# Altium PCB Copy4 of PWR_PCB.PcbDoc (part 2 of 3)
Units mil, origin at the board's own origin, x right, y up, seen from the top; angles counter-clockwise.
Board outline 8100 x 5345 mil, 4 copper layers (Top Layer, GND Layer, Power Layer, Bottom Layer), stack 27.912 mil thick; 117 components, 88 nets, 440 pads, 3252 vias.
Unrouted connection lines stored in the file: 22.
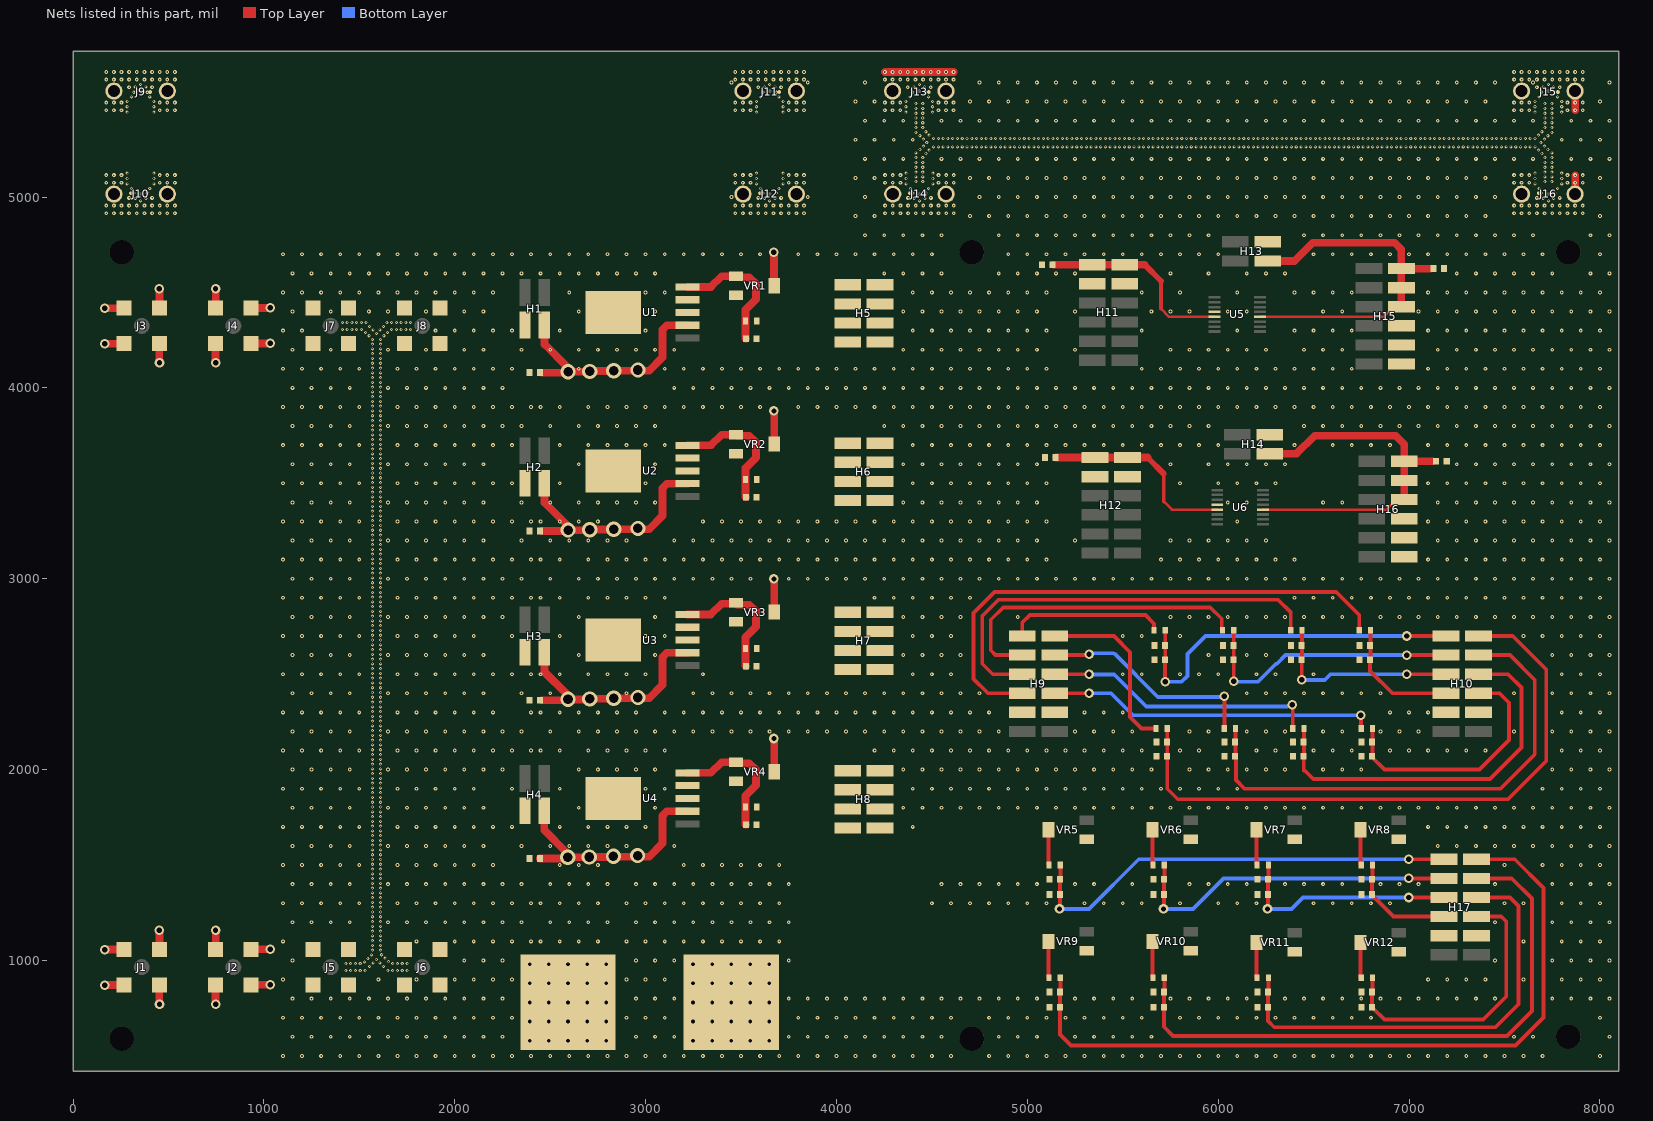
[diagram p4: the nets of this part, all layers, seen from the top]

## Via types
v1: diameter 20, hole 9, Top Layer to Bottom Layer, tented both sides, 2106 vias
v2: diameter 16, hole 8, Top Layer to Bottom Layer, 642 vias
v3: diameter 20, hole 8, Top Layer to Bottom Layer, tented both sides, 272 vias
v4: diameter 16, hole 8, Top Layer to Bottom Layer, tented both sides, 104 vias
v5: diameter 50, hole 28, Top Layer to Bottom Layer, 62 vias
v6: diameter 30, hole 19, Top Layer to Bottom Layer, 50 vias
v7: diameter 80, hole 50, Top Layer to Bottom Layer, 16 vias

## Nets (pads, with @x,y where several pads share a name; then routed paths per layer and width w, separated by ;. In a path a pad name is that pad's centre, name@x,y a point inside that pad or via, vN(x,y) a via of type N, cw(c..) or ccw(c..) an arc to the next point about the centre after c; other vN are vias at no path point) (continued)
GND: C1.1 C2.1 C3.1 C4.1 C9.1 C10.1 C11.1 C12.1 C13.1 C14.1 C15.1 C16.1 C17.1 C18.1 C19.1 C20.1 C21.1 C22.1 C23.1 C24.1 C25.1 C26.1 C27.1 C28.1 C29.1 C30.1 C31.1 C32.1 C33.1 C34.1 C35.1 C36.1 C37.1 C38.1 C39.1 C40.1 C41.1 C42.1 C43.1 C44.1 H1.1 H2.1 H3.1 H4.1 H5.1 H5.3 H5.5 H5.7 H6.1 H6.3 H6.5 H6.7 H7.1 H7.3 H7.5 H7.7 H8.1 H8.3 H8.5 H8.7 H9.5 H9.11 H10.5 H10.11 H11.5 H11.11 H12.5 H12.11 H13.3 H14.3 H15.1 H15.2 H15.3 H16.1 H16.2 H16.3 H17.5 H17.11 J1.2 J1.3 J1.4 J1.5 J2.2 J2.3 J2.4 J2.5 J3.2 J3.3 J3.4 J3.5 J4.2 J4.3 J4.4 J4.5 J5.2 J5.3 J5.4 J5.5 J6.2 J6.3 J6.4 J6.5 J7.2 J7.3 J7.4 J7.5 J8.2 J8.3 J8.4 J8.5 J9.1 J9.2 J9.4 J10.1 J10.2 J10.4 J11.1 J11.2 J11.4 J12.1 J12.2 J12.4 J13.1 J13.2 J13.4 J14.1 J14.2 J14.4 J15.1 J15.2 J15.4 J16.1 J16.2 J16.4 P2.1 U1.3 U1.6 U2.3 U2.6 U3.3 U3.6 U4.3 U4.6 U5.12 U6.12 VR1.2 VR2.2 VR3.2 VR4.2 | length 2865.5
  Top Layer w40: v5(165.75,1057) 166.5,1057.75 265.75,1057.75 J1.3@266.5,1058.5 ; v5(165.75,4417) 166.5,4417.75 265.75,4417.75 J3.3@266.5,4418.5 ; v5(166.5,870.75) 167.25,871.5 J1.2@266.5,871.5 ; v5(166.5,4230.75) 167.25,4231.5 J3.2@266.5,4231.5 ; J1.5@452.52,871.5 452.52,772.25 v5(453.27,771.5) ; J3.5@452.52,4231.5 452.52,4132.25 v5(453.27,4131.5) ; v5(452.75,1158.5) 453.5,1157.75 J1.4@453.5,1058.5 ; v5(452.75,4518.5) 453.5,4517.75 J3.4@453.5,4418.5 ; J2.2@746.5,871.5 746.5,772.25 v5(747.25,771.5) ; J4.2@746.5,4231.5 746.5,4132.25 v5(747.25,4131.5) ; v5(746.73,1158.5) 747.48,1157.75 J2.3@747.48,1058.5 ; v5(746.73,4518.5) 747.48,4517.75 J4.3@747.48,4418.5 ; J2.5@933.5,871.5 934.25,872.25 1033.5,872.25 v5(1034.25,873) ; J2.4@933.5,1058.5 1032.75,1058.5 v5(1033.5,1059.25) ; J4.5@933.5,4231.5 934.25,4232.25 1033.5,4232.25 v5(1034.25,4233) ; J4.4@933.5,4418.5 1032.75,4418.5 v5(1033.5,4419.25) ; v5(3671.5,4710) 3672.49,4709.02 3672.49,4535.98 VR1.2@3673.47,4535 ; VR4.2@3673.47,1988.92 v5@3673.47,2161.95 ; VR3.2@3673.47,2825 v5@3673.47,2998.03 ; VR2.2@3673.47,3705 v5@3673.47,3878.03 ; v3(4254,5655) v3(4294,5655) v3(4334,5655) v3(4374,5655) v3(4414,5655) v3(4454,5655) v3(4494,5655) v3(4534,5655) v3(4574,5655) v3(4614,5655) ; J13.4@4294,5555 J13.4@4294.5,5554.5 ; J14.1@4294.5,5015.5 J14.1@4295,5015 ; J16.4@7870,5015 v3(7870,5075) v3(7870,5115) ; v3(7870,5455) v3(7870,5495) J15.1@7870,5555
  other v1: 1100,500 1200,500 1300,500 1400,500 1500,500 1600,500 1700,500 1800,500 1900,500 2000,500 2100,500 2200,500 2300,500 2400,500 2500,500 2600,500 2700,500 2800,500 2900,500 3000,500 3100,500 3200,500 3300,500 3400,500 3500,500 3600,500 3700,500 3800,500 3900,500 4000,500 4100,500 4200,500 4300,500 4400,500 4500,500 4600,500 4800,500 4900,500 5000,500 5100,500 5200,500 5300,500 5400,500 5500,500 5600,500 5700,500 5800,500 5900,500 6000,500 6100,500 6200,500 6300,500 6400,500 6500,500 6600,500 6700,500 6800,500 6900,500 7000,500 7100,500 7200,500 7300,500 7400,500 7500,500 7600,500 7700,500 8000,500 1150,600 1250,600 1350,600 1450,600 1550,600 1650,600 1750,600 1850,600 1950,600 2050,600 2150,600 2250,600 2950,600 3050,600 3150,600 3750,600 3850,600 3950,600 4050,600 4150,600 4250,600 4350,600 4450,600 4550,600 4850,600 4950,600 5050,600 5250,600 5350,600 5450,600 5550,600 5650,600 7550,600 7650,600 8050,600 1100,700 1200,700 1300,700 1400,700 1500,700 1600,700 1700,700 1800,700 1900,700 2000,700 2100,700 2200,700 2300,700 2900,700 3000,700 3100,700 3800,700 3900,700 4000,700 4100,700 4200,700 4300,700 4400,700 4500,700 4600,700 4800,700 4900,700 5000,700 5100,700 5200,700 5300,700 5400,700 5500,700 5600,700 5800,700 5900,700 6000,700 6100,700 6200,700 6300,700 6400,700 6500,700 6600,700 6700,700 6800,700 8000,700 1150,800 1250,800 1350,800 1450,800 1550,800 1650,800 1750,800 1850,800 1950,800 2050,800 2150,800 2250,800 2950,800 3050,800 3150,800 3750,800 3850,800 3950,800 4050,800 4150,800 4250,800 4350,800 4450,800 4550,800 4650,800 4750,800 4850,800 4950,800 5050,800 5250,800 5350,800 5450,800 5550,800 5750,800 5850,800 5950,800 6050,800 6150,800 6350,800 6450,800 6550,800 6650,800 6750,800 6850,800 6950,800 7050,800 7150,800 7250,800 7350,800 7450,800 7750,800 7850,800 7950,800 8050,800 1100,900 1600,900 1800,900 2000,900 2100,900 2200,900 2300,900 2900,900 3000,900 3100,900 7100,900 7200,900 7300,900 7400,900 7600,900 7800,900 7900,900 8000,900 1150,1000 2050,1000 2150,1000 2250,1000 2950,1000 3050,1000 3150,1000 3750,1000 7450,1000 7750,1000 7850,1000 7950,1000 8050,1000 1100,1100 1800,1100 2000,1100 2100,1100 2200,1100 2300,1100 2400,1100 2900,1100 3000,1100 3100,1100 3200,1100 3300,1100 3400,1100 3500,1100 3600,1100 3700,1100 7600,1100 7800,1100 7900,1100 8000,1100 1150,1200 1250,1200 1350,1200 1450,1200 1650,1200 1750,1200 1850,1200 1950,1200 2050,1200 2150,1200 2250,1200 2350,1200 2950,1200 3050,1200 3150,1200 3250,1200 3350,1200 3450,1200 3550,1200 3650,1200 3750,1200 7450,1200 7750,1200 7850,1200 7950,1200 8050,1200 1100,1300 1200,1300 1300,1300 1400,1300 1500,1300 1700,1300 1800,1300 1900,1300 2000,1300 2100,1300 2200,1300 2300,1300 2400,1300 2900,1300 3000,1300 3100,1300 3200,1300 3300,1300 3400,1300 3500,1300 3600,1300 3700,1300 4500,1300 4600,1300 4700,1300 4800,1300 4900,1300 5000,1300 5100,1300 5300,1300 5400,1300 5500,1300 5600,1300 5800,1300 6000,1300 6100,1300 6200,1300 6500,1300 6600,1300 6700,1300 6800,1300 6900,1300 7500,1300 7600,1300 7800,1300 7900,1300 8000,1300 1150,1400 1250,1400 1350,1400 1450,1400 1650,1400 1750,1400 1850,1400 1950,1400 2050,1400 2150,1400 2250,1400 2350,1400 2950,1400 3050,1400 3150,1400 3250,1400 3350,1400 3450,1400 3550,1400 3650,1400 3750,1400 4550,1400 4650,1400 4750,1400 4850,1400 4950,1400 5050,1400 5250,1400 5350,1400 5550,1400 5850,1400 5950,1400 6050,1400 6150,1400 6350,1400 6450,1400 6550,1400 6650,1400 6850,1400 6950,1400 7050,1400 7450,1400 7750,1400 7850,1400 7950,1400 8050,1400 1100,1500 1200,1500 1300,1500 1400,1500 1500,1500 1700,1500 1800,1500 1900,1500 2000,1500 2100,1500 2200,1500 3200,1500 3300,1500 3400,1500 3500,1500 3600,1500 3700,1500 7500,1500 7700,1500 7800,1500 7900,1500 8000,1500 1150,1600 1250,1600 1350,1600 1450,1600 1650,1600 1750,1600 1850,1600 1950,1600 2050,1600 2150,1600 2350,1600 3150,1600 7150,1600 7250,1600 7350,1600 7450,1600 7550,1600 7650,1600 7750,1600 7850,1600 7950,1600 8050,1600 1100,1700 1200,1700 1300,1700 1400,1700 1500,1700 1700,1700 1800,1700 1900,1700 2000,1700 2100,1700 2200,1700 2300,1700 2700,1700 2800,1700 2900,1700 3000,1700 4400,1700 7100,1700 7200,1700 7300,1700 7400,1700 7500,1700 7600,1700 7700,1700 7800,1700 7900,1700 8000,1700 1150,1800 1250,1800 1350,1800 1450,1800 1650,1800 1750,1800 1850,1800 1950,1800 2050,1800 2150,1800 2650,1800 3050,1800 4350,1800 4450,1800 4550,1800 4650,1800 4750,1800 4850,1800 4950,1800 5050,1800 5150,1800 5250,1800 5350,1800 5450,1800 5550,1800 5650,1800 5750,1800 5850,1800 5950,1800 6050,1800 6150,1800 6250,1800 6350,1800 6450,1800 6550,1800 6650,1800 6750,1800 6850,1800 6950,1800 7050,1800 7150,1800 7250,1800 7350,1800 7450,1800 7550,1800 7650,1800 7750,1800 7850,1800 7950,1800 8050,1800 1100,1900 1200,1900 1300,1900 1400,1900 1500,1900 1700,1900 1800,1900 1900,1900 2000,1900 2100,1900 2300,1900 3000,1900 3100,1900 4400,1900 4500,1900 4600,1900 4700,1900 4800,1900 4900,1900 5000,1900 5100,1900 5200,1900 5300,1900 5400,1900 5500,1900 5600,1900 5700,1900 5800,1900 5900,1900 6000,1900 6100,1900 7700,1900 7800,1900 7900,1900 8000,1900 1150,2000 1250,2000 1350,2000 1450,2000 1650,2000 1750,2000 1850,2000 1950,2000 2050,2000 2150,2000 2250,2000 2650,2000 2750,2000 2850,2000 2950,2000 3050,2000 4350,2000 4450,2000 4550,2000 4650,2000 4750,2000 4850,2000 4950,2000 5050,2000 5150,2000 5250,2000 5350,2000 5450,2000 5550,2000 5650,2000 5850,2000 5950,2000 6050,2000 6150,2000 6250,2000 6350,2000 6550,2000 6650,2000 6750,2000 7750,2000 7850,2000 7950,2000 8050,2000 1100,2100 1200,2100 1300,2100 1400,2100 1500,2100 1700,2100 1800,2100 1900,2100 2000,2100 2100,2100 2200,2100 2300,2100 2400,2100 2700,2100 2800,2100 2900,2100 3000,2100 3100,2100 4200,2100 4300,2100 4400,2100 4500,2100 4600,2100 4700,2100 4800,2100 4900,2100 5000,2100 5100,2100 5200,2100 5300,2100 5400,2100 5500,2100 5600,2100 5800,2100 5900,2100 6200,2100 6300,2100 6500,2100 6600,2100 6700,2100 6900,2100 7000,2100 7100,2100 7200,2100 7300,2100 7400,2100 7800,2100 7900,2100 8000,2100 1150,2200 1250,2200 1350,2200 1450,2200 1650,2200 1750,2200 1850,2200 1950,2200 2050,2200 2150,2200 2250,2200 2350,2200 2650,2200 2750,2200 2850,2200 2950,2200 3050,2200 3150,2200 3250,2200 3350,2200 3450,2200 3550,2200 3650,2200 3750,2200 3850,2200 3950,2200 4050,2200 4150,2200 4250,2200 4350,2200 4450,2200 4550,2200 4650,2200 4750,2200 4850,2200 5250,2200 5350,2200 5450,2200 5550,2200 5850,2200 5950,2200 6150,2200 6250,2200 6350,2200 6550,2200 6650,2200 6850,2200 6950,2200 7050,2200 7550,2200 7750,2200 7850,2200 7950,2200 8050,2200 1100,2300 1200,2300 1300,2300 1400,2300 1500,2300 1700,2300 1800,2300 1900,2300 2000,2300 2100,2300 2200,2300 2400,2300 3100,2300 3200,2300 3300,2300 3400,2300 3500,2300 3600,2300 3700,2300 3800,2300 3900,2300 4000,2300 4100,2300 4200,2300 4300,2300 4400,2300 4500,2300 4600,2300 4700,2300 4800,2300 5300,2300 5400,2300 5500,2300 6900,2300 7000,2300 7100,2300 7800,2300 7900,2300 8000,2300 1150,2400 1250,2400 1350,2400 1450,2400 1650,2400 1750,2400 1850,2400 1950,2400 2050,2400 2150,2400 2350,2400 3250,2400 3350,2400 3450,2400 3550,2400 3650,2400 3750,2400 3850,2400 3950,2400 4050,2400 4150,2400 4250,2400 4350,2400 4450,2400 4550,2400 4650,2400 4750,2400 6150,2400 6250,2400 6350,2400 6450,2400 6550,2400 6650,2400 6750,2400 6850,2400 7550,2400 7750,2400 7850,2400 7950,2400 8050,2400 1100,2500 1200,2500 1300,2500 1400,2500 1500,2500 1700,2500 1800,2500 1900,2500 2000,2500 2100,2500 2200,2500 2300,2500 2400,2500 2700,2500 2800,2500 2900,2500 3000,2500 3300,2500 4400,2500 4500,2500 4600,2500 5500,2500 5600,2500 5800,2500 5900,2500 6000,2500 6200,2500 6300,2500 6500,2500 7800,2500 7900,2500 8000,2500 1150,2600 1250,2600 1350,2600 1450,2600 1650,2600 1750,2600 1850,2600 1950,2600 2050,2600 2150,2600 2650,2600 3050,2600 4350,2600 4450,2600 4550,2600 4650,2600 5950,2600 6150,2600 6250,2600 7750,2600 7850,2600 7950,2600 8050,2600 1100,2700 1200,2700 1300,2700 1400,2700 1500,2700 1700,2700 1800,2700 1900,2700 2000,2700 2100,2700 2300,2700 3000,2700 3100,2700 4400,2700 4500,2700 4600,2700 5500,2700 5600,2700 5800,2700 7600,2700 7700,2700 7800,2700 7900,2700 8000,2700 1150,2800 1250,2800 1350,2800 1450,2800 1650,2800 1750,2800 1850,2800 1950,2800 2050,2800 2150,2800 2250,2800 2650,2800 3050,2800 4350,2800 4450,2800 4550,2800 4650,2800 4950,2800 5750,2800 5850,2800 5950,2800 6050,2800 6150,2800 6250,2800 6350,2800 6450,2800 6550,2800 6650,2800 6850,2800 6950,2800 7050,2800 7150,2800 7250,2800 7350,2800 7450,2800 7550,2800 7650,2800 7750,2800 7850,2800 7950,2800 8050,2800 1100,2900 1200,2900 1300,2900 1400,2900 1500,2900 1700,2900 1800,2900 1900,2900 2000,2900 2100,2900 2200,2900 2300,2900 2400,2900 2700,2900 2800,2900 2900,2900 3000,2900 3100,2900 4200,2900 4300,2900 4400,2900 4500,2900 4600,2900 4700,2900 6400,2900 6500,2900 6600,2900 6700,2900 6800,2900 6900,2900 7000,2900 7100,2900 7200,2900 7300,2900 7400,2900 7500,2900 7600,2900 7700,2900 7800,2900 7900,2900 8000,2900 1150,3000 1250,3000 1350,3000 1450,3000 1650,3000 1750,3000 1850,3000 1950,3000 2050,3000 2150,3000 2250,3000 2350,3000 2650,3000 2750,3000 2850,3000 2950,3000 3050,3000 3150,3000 3250,3000 3350,3000 3450,3000 3550,3000 3750,3000 3850,3000 3950,3000 4050,3000 4150,3000 4250,3000 4350,3000 4450,3000 4550,3000 4650,3000 4750,3000 4850,3000 4950,3000 5050,3000 5150,3000 5250,3000 5350,3000 5450,3000 5550,3000 5650,3000 5750,3000 5850,3000 5950,3000 6050,3000 6150,3000 6250,3000 6350,3000 6450,3000 6550,3000 6650,3000 6750,3000 6850,3000 6950,3000 7050,3000 7150,3000 7250,3000 7350,3000 7450,3000 7550,3000 7650,3000 7750,3000 7850,3000 7950,3000 8050,3000 1100,3100 1200,3100 1300,3100 1400,3100 1500,3100 1700,3100 1800,3100 1900,3100 2000,3100 2100,3100 2200,3100 2300,3100 2400,3100 2700,3100 2800,3100 2900,3100 3000,3100 3100,3100 3200,3100 3300,3100 3400,3100 3500,3100 3600,3100 3700,3100 3800,3100 3900,3100 4000,3100 4100,3100 4200,3100 4300,3100 4400,3100 4500,3100 4600,3100 4700,3100 4800,3100 4900,3100 5000,3100 5100,3100 5700,3100 5800,3100 5900,3100 6000,3100 6100,3100 6200,3100 6300,3100 6400,3100 7100,3100 7200,3100 7300,3100 7400,3100 7500,3100 7600,3100 7700,3100 7800,3100 7900,3100 8000,3100 1150,3200 1250,3200 1350,3200 1450,3200 1650,3200 1750,3200 1850,3200 1950,3200 2050,3200 2150,3200 2350,3200 3150,3200 3250,3200 3350,3200 3450,3200 3550,3200 3650,3200 3750,3200 3850,3200 3950,3200 4050,3200 4150,3200 4250,3200 4350,3200 4450,3200 4550,3200 4650,3200 4750,3200 4850,3200 4950,3200 5050,3200 5250,3200 5750,3200 5850,3200 5950,3200 6050,3200 6150,3200 6250,3200 7150,3200 7250,3200 7350,3200 7450,3200 7550,3200 7650,3200 7750,3200 7850,3200 7950,3200 8050,3200 1100,3300 1200,3300 1300,3300 1400,3300 1500,3300 1700,3300 1800,3300 1900,3300 2000,3300 2100,3300 2200,3300 2300,3300 2400,3300 3300,3300 3400,3300 3500,3300 3600,3300 3700,3300 3800,3300 3900,3300 4000,3300 4100,3300 4200,3300 4300,3300 4400,3300 4500,3300 4600,3300 4700,3300 4800,3300 4900,3300 5000,3300 5100,3300 6100,3300 7100,3300 7200,3300 7300,3300 7400,3300 7500,3300 7600,3300 7700,3300 7800,3300 7900,3300 8000,3300 1150,3400 1250,3400 1350,3400 1450,3400 1650,3400 1750,3400 1850,3400 1950,3400 2050,3400 2150,3400 2350,3400 2650,3400 2750,3400 2850,3400 2950,3400 3050,3400 4350,3400 4450,3400 4550,3400 4650,3400 4750,3400 4850,3400 4950,3400 5050,3400 6050,3400 6150,3400 6550,3400 6650,3400 7150,3400 7250,3400 7350,3400 7450,3400 7550,3400 7650,3400 7750,3400 7850,3400 7950,3400 8050,3400 1100,3500 1200,3500 1300,3500 1400,3500 1500,3500 1700,3500 1800,3500 1900,3500 2000,3500 2100,3500 2200,3500 2300,3500 3000,3500 4400,3500 4500,3500 4600,3500 4700,3500 4800,3500 4900,3500 5000,3500 5100,3500 5800,3500 6000,3500 6100,3500 6200,3500 6300,3500 7100,3500 7200,3500 7300,3500 7400,3500 7500,3500 7600,3500 7700,3500 7800,3500 7900,3500 8000,3500 1150,3600 1250,3600 1350,3600 1450,3600 1650,3600 1750,3600 1850,3600 1950,3600 2050,3600 2150,3600 2650,3600 3050,3600 4350,3600 4450,3600 4550,3600 4650,3600 4750,3600 4850,3600 4950,3600 5050,3600 5750,3600 5950,3600 6050,3600 6150,3600 6250,3600 6350,3600 7250,3600 7350,3600 7450,3600 7550,3600 7650,3600 7750,3600 7850,3600 7950,3600 8050,3600 1100,3700 1200,3700 1300,3700 1400,3700 1500,3700 1700,3700 1800,3700 1900,3700 2000,3700 2100,3700 2200,3700 2300,3700 2700,3700 2800,3700 2900,3700 3000,3700 3100,3700 4400,3700 4500,3700 4600,3700 4700,3700 4800,3700 4900,3700 5000,3700 5100,3700 5200,3700 5300,3700 5400,3700 5500,3700 5600,3700 5700,3700 5800,3700 5900,3700 6000,3700 6400,3700 6600,3700 6700,3700 6800,3700 6900,3700 7100,3700 7200,3700 7300,3700 7400,3700 7500,3700 7600,3700 7700,3700 7800,3700 7900,3700 8000,3700 1150,3800 1250,3800 1350,3800 1450,3800 1650,3800 1750,3800 1850,3800 1950,3800 2050,3800 2150,3800 2250,3800 2350,3800 2650,3800 2750,3800 2850,3800 2950,3800 3050,3800 4250,3800 4350,3800 4450,3800 4550,3800 4650,3800 4750,3800 4850,3800 4950,3800 5050,3800 5150,3800 5250,3800 5350,3800 5450,3800 5550,3800 5650,3800 5750,3800 5850,3800 5950,3800 6450,3800 6550,3800 6650,3800 6750,3800 6850,3800 6950,3800 7050,3800 7150,3800 7250,3800 7350,3800 7450,3800 7550,3800 7650,3800 7750,3800 7850,3800 7950,3800 8050,3800 1100,3900 1200,3900 1300,3900 1400,3900 1500,3900 1700,3900 1800,3900 1900,3900 2000,3900 2100,3900 2200,3900 2300,3900 2400,3900 2700,3900 2800,3900 2900,3900 3000,3900 3100,3900 3200,3900 3300,3900 3400,3900 3500,3900 3600,3900 3800,3900 3900,3900 4000,3900 4100,3900 4200,3900 4300,3900 4400,3900 4500,3900 4600,3900 4700,3900 4800,3900 4900,3900 5000,3900 5100,3900 5200,3900 5300,3900 5400,3900 5500,3900 5600,3900 5700,3900 5800,3900 5900,3900 6000,3900 6100,3900 6200,3900 6300,3900 6400,3900 6500,3900 6600,3900 6700,3900 6800,3900 6900,3900 7000,3900 7100,3900 7200,3900 7300,3900 7400,3900 7500,3900 7600,3900 7700,3900 7800,3900 7900,3900 8000,3900 1150,4000 1250,4000 1350,4000 1450,4000 1650,4000 1750,4000 1850,4000 1950,4000 2050,4000 2150,4000 2250,4000 3150,4000 3250,4000 3350,4000 3450,4000 3550,4000 3650,4000 3750,4000 3850,4000 3950,4000 4050,4000 4150,4000 4250,4000 4350,4000 4450,4000 4550,4000 4650,4000 4750,4000 4850,4000 4950,4000 5050,4000 5150,4000 5250,4000 5350,4000 5450,4000 5550,4000 5650,4000 5750,4000 5850,4000 5950,4000 6050,4000 6150,4000 6250,4000 6350,4000 6450,4000 6550,4000 6650,4000 6750,4000 6850,4000 6950,4000 7050,4000 7150,4000 7250,4000 7350,4000 7450,4000 7550,4000 7650,4000 7750,4000 7850,4000 7950,4000 8050,4000 1100,4100 1200,4100 1300,4100 1400,4100 1500,4100 1700,4100 1800,4100 1900,4100 2000,4100 2100,4100 2200,4100 2300,4100 3100,4100 3200,4100 3300,4100 3400,4100 3500,4100 3600,4100 3700,4100 3800,4100 3900,4100 4000,4100 4100,4100 4200,4100 4300,4100 4400,4100 4500,4100 4600,4100 4700,4100 4800,4100 4900,4100 5000,4100 5100,4100 5600,4100 5700,4100 5800,4100 5900,4100 6000,4100 6100,4100 6200,4100 6300,4100 6400,4100 6500,4100 6600,4100 6700,4100 7100,4100 7200,4100 7300,4100 7400,4100 7500,4100 7600,4100 7700,4100 7800,4100 7900,4100 8000,4100 1150,4200 1350,4200 1650,4200 1850,4200 2050,4200 2150,4200 2350,4200 2650,4200 2750,4200 2850,4200 2950,4200 3050,4200 3150,4200 4350,4200 4450,4200 4550,4200 4650,4200 4750,4200 4850,4200 4950,4200 5050,4200 5250,4200 5750,4200 5850,4200 5950,4200 6050,4200 6150,4200 6250,4200 6450,4200 6550,4200 6650,4200 7150,4200 7250,4200 7350,4200 7450,4200 7550,4200 7650,4200 7750,4200 7850,4200 7950,4200 8050,4200 1100,4300 1200,4300 1900,4300 2000,4300 2100,4300 2200,4300 2300,4300 3000,4300 4400,4300 4500,4300 4600,4300 4700,4300 4800,4300 4900,4300 5000,4300 5100,4300 5600,4300 6100,4300 6400,4300 6500,4300 6600,4300 6700,4300 7100,4300 7200,4300 7300,4300 7400,4300 7500,4300 7600,4300 7700,4300 7800,4300 7900,4300 8000,4300 1150,4400 1350,4400 1550,4400 1650,4400 1850,4400 2050,4400 2150,4400 2650,4400 3050,4400 4350,4400 4450,4400 4550,4400 4650,4400 4750,4400 4850,4400 4950,4400 5050,4400 5250,4400 5650,4400 5750,4400 5850,4400 6050,4400 6150,4400 6550,4400 6650,4400 7050,4400 7150,4400 7250,4400 7350,4400 7450,4400 7550,4400 7650,4400 7750,4400 7850,4400 7950,4400 8050,4400 1100,4500 1200,4500 1300,4500 1400,4500 1500,4500 1600,4500 1700,4500 1800,4500 1900,4500 2000,4500 2100,4500 2200,4500 2600,4500 3000,4500 3100,4500 4400,4500 4500,4500 4600,4500 4700,4500 4800,4500 4900,4500 5000,4500 5100,4500 5600,4500 5800,4500 6100,4500 6400,4500 6500,4500 6600,4500 6700,4500 7100,4500 7200,4500 7300,4500 7400,4500 7500,4500 7600,4500 7700,4500 7800,4500 7900,4500 8000,4500 1150,4600 1250,4600 1350,4600 1450,4600 1550,4600 1650,4600 1750,4600 1850,4600 1950,4600 2050,4600 2150,4600 2250,4600 2350,4600 2450,4600 2550,4600 2650,4600 2750,4600 2850,4600 2950,4600 3050,4600 4250,4600 4350,4600 4450,4600 4550,4600 4850,4600 4950,4600 5050,4600 5150,4600 5250,4600 5750,4600 5950,4600 6150,4600 6250,4600 6350,4600 7250,4600 7350,4600 7450,4600 7550,4600 7650,4600 7750,4600 7950,4600 8050,4600 1100,4700 1200,4700 1300,4700 1400,4700 1500,4700 1600,4700 1700,4700 1800,4700 1900,4700 2000,4700 2100,4700 2200,4700 2300,4700 2400,4700 2500,4700 2600,4700 2700,4700 2800,4700 2900,4700 3000,4700 3100,4700 3200,4700 3300,4700 3400,4700 3500,4700 3600,4700 3800,4700 3900,4700 4000,4700 4100,4700 4200,4700 4300,4700 4400,4700 4500,4700 4900,4700 5000,4700 5100,4700 5200,4700 5300,4700 5400,4700 5500,4700 5600,4700 5700,4700 5800,4700 5900,4700 6000,4700 6500,4700 6600,4700 6700,4700 6800,4700 6900,4700 7000,4700 7100,4700 7200,4700 7300,4700 7400,4700 7500,4700 7600,4700 7700,4700 8000,4700 4150,4800 4250,4800 4350,4800 4450,4800 4550,4800 4850,4800 4950,4800 5050,4800 5150,4800 5250,4800 5350,4800 5450,4800 5550,4800 5650,4800 5750,4800 5850,4800 5950,4800 6450,4800 6550,4800 6650,4800 6750,4800 6850,4800 6950,4800 7050,4800 7150,4800 7250,4800 7350,4800 7450,4800 7550,4800 7650,4800 7950,4800 8050,4800 4100,4900 4200,4900 4700,4900 4800,4900 4900,4900 5000,4900 5100,4900 5200,4900 5300,4900 5400,4900 5500,4900 5600,4900 5700,4900 5800,4900 5900,4900 6000,4900 6100,4900 6200,4900 6300,4900 6400,4900 6500,4900 6600,4900 6700,4900 6800,4900 6900,4900 7000,4900 7100,4900 7200,4900 7300,4900 7400,4900 8000,4900 3450,5000 3850,5000 4150,5000 4750,5000 4850,5000 4950,5000 5050,5000 5150,5000 5250,5000 5350,5000 5450,5000 5550,5000 5650,5000 5750,5000 5850,5000 5950,5000 6050,5000 6150,5000 6250,5000 6350,5000 6450,5000 6550,5000 6650,5000 6750,5000 6850,5000 6950,5000 7050,5000 7150,5000 7250,5000 7350,5000 7450,5000 8050,5000 4100,5100 4200,5100 4700,5100 4800,5100 4900,5100 5000,5100 5100,5100 5200,5100 5300,5100 5400,5100 5500,5100 5600,5100 5700,5100 5800,5100 5900,5100 6000,5100 6100,5100 6200,5100 6300,5100 6400,5100 6500,5100 6600,5100 6700,5100 6800,5100 6900,5100 7000,5100 7100,5100 7200,5100 7300,5100 7400,5100 8000,5100 4150,5200 4250,5200 4350,5200 4550,5200 4650,5200 4750,5200 4850,5200 4950,5200 5050,5200 5150,5200 5250,5200 5350,5200 5450,5200 5550,5200 5650,5200 5750,5200 5850,5200 5950,5200 6050,5200 6150,5200 6250,5200 6350,5200 6450,5200 6550,5200 6650,5200 6750,5200 6850,5200 6950,5200 7050,5200 7150,5200 7250,5200 7350,5200 7450,5200 7550,5200 7650,5200 7850,5200 7950,5200 8050,5200 4100,5300 4200,5300 4300,5300 4400,5300 7800,5300 7900,5300 8000,5300 4150,5400 4250,5400 4350,5400 4550,5400 4650,5400 4750,5400 4850,5400 4950,5400 5050,5400 5150,5400 5250,5400 5350,5400 5450,5400 5550,5400 5650,5400 5750,5400 5850,5400 5950,5400 6050,5400 6150,5400 6250,5400 6350,5400 6450,5400 6550,5400 6650,5400 6750,5400 6850,5400 6950,5400 7050,5400 7150,5400 7250,5400 7350,5400 7450,5400 7550,5400 7650,5400 7850,5400 7950,5400 8050,5400 4100,5500 4200,5500 4700,5500 4800,5500 4900,5500 5000,5500 5100,5500 5200,5500 5300,5500 5400,5500 5500,5500 5600,5500 5700,5500 5800,5500 5900,5500 6000,5500 6100,5500 6200,5500 6300,5500 6400,5500 6500,5500 6600,5500 6700,5500 6800,5500 6900,5500 7000,5500 7100,5500 7200,5500 7300,5500 7400,5500 8000,5500 3450,5600 3850,5600 4150,5600 4750,5600 4850,5600 4950,5600 5050,5600 5150,5600 5250,5600 5350,5600 5450,5600 5550,5600 5650,5600 5750,5600 5850,5600 5950,5600 6050,5600 6150,5600 6250,5600 6350,5600 6450,5600 6550,5600 6650,5600 6750,5600 6850,5600 6950,5600 7050,5600 7150,5600 7250,5600 7350,5600 7450,5600 7650,5600 8050,5600
  other v2: 1430,947 1455,947 1480,947 1505,947 1530,947 1650,947 1675,947 1700,947 1725,947 1750,947 1554,969 1626,969 1430,983 1455,983 1480,983 1505,983 1675,983 1700,983 1725,983 1750,983 1572,987 1608,987 1527,993 1653,994 1590,1005 1545,1011 1635,1012 1563,1029 1617,1030 1568,1054 1612,1054 1568,1079 1612,1079 1568,1104 1612,1104 1568,1129 1612,1129 1568,1154 1612,1154 1568,1179 1612,1179 1568,1204 1612,1204 1568,1229 1612,1229 1568,1254 1612,1254 1568,1279 1612,1279 1568,1304 1612,1304 1568,1329 1612,1329 1568,1354 1612,1354 1568,1379 1612,1379 1568,1404 1612,1404 1568,1429 1612,1429 1568,1454 1612,1454 1568,1479 1612,1479 1568,1504 1612,1504 1568,1529 1612,1529 1568,1554 1612,1554 1568,1579 1612,1579 1568,1604 1612,1604 1568,1629 1612,1629 1568,1654 1612,1654 1568,1679 1612,1679 1568,1704 1612,1704 1568,1729 1612,1729 1568,1754 1612,1754 1568,1779 1612,1779 1568,1804 1612,1804 1568,1829 1612,1829 1568,1854 1612,1854 1568,1879 1612,1879 1568,1904 1612,1904 1568,1929 1612,1929 1568,1954 1612,1954 1568,1979 1612,1979 1568,2004 1612,2004 1568,2029 1612,2029 1568,2054 1612,2054 1568,2079 1612,2079 1568,2104 1612,2104 1568,2129 1612,2129 1568,2154 1612,2154 1568,2179 1612,2179 1568,2204 1612,2204 1568,2229 1612,2229 1568,2254 1612,2254 1568,2279 1612,2279 1568,2304 1612,2304 1568,2329 1612,2329 1568,2354 1612,2354 1568,2379 1612,2379 1568,2404 1612,2404 1568,2429 1612,2429 1568,2454 1612,2454 1568,2479 1612,2479 1568,2504 1612,2504 1568,2529 1612,2529 1568,2554 1612,2554 1568,2579 1612,2579 1568,2604 1612,2604 1568,2629 1612,2629 1568,2654 1612,2654 1568,2679 1612,2679 1568,2704 1612,2704 1568,2729 1612,2729 1568,2754 1612,2754 1568,2779 1612,2779 1568,2804 1612,2804 1568,2829 1612,2829 1568,2854 1612,2854 1568,2879 1612,2879 1568,2904 1612,2904 1568,2929 1612,2929 1568,2954 1612,2954 1568,2979 1612,2979 1568,3004 1612,3004 1568,3029 1612,3029 1568,3054 1612,3054 1568,3079 1612,3079 1568,3104 1612,3104 1568,3129 1612,3129 1568,3154 1612,3154 1568,3179 1612,3179 1568,3204 1612,3204 1568,3229 1612,3229 1568,3254 1612,3254 1568,3279 1612,3279 1568,3304 1612,3304 1568,3329 1612,3329 1568,3354 1612,3354 1568,3379 1612,3379 1568,3404 1612,3404 1568,3429 1612,3429 1568,3454 1612,3454 1568,3479 1612,3479 1568,3504 1612,3504 1568,3529 1612,3529 1568,3554 1612,3554 1568,3579 1612,3579 1568,3604 1612,3604 1568,3629 1612,3629 1568,3654 1612,3654 1568,3679 1612,3679 1568,3704 1612,3704 1568,3729 1612,3729 1568,3754 1612,3754 1568,3779 1612,3779 1568,3804 1612,3804 1568,3829 1612,3829 1568,3854 1612,3854 1568,3879 1612,3879 1568,3904 1612,3904 1568,3929 1612,3929 1568,3954 1612,3954 1568,3979 1612,3979 1568,4004 1612,4004 1568,4029 1612,4029 1568,4054 1612,4054 1568,4079 1612,4079 1568,4104 1612,4104 1568,4129 1612,4129 1568,4154 1612,4154 1568,4179 1612,4179 1568,4204 1612,4204 1568,4229 1612,4229 1568,4254 1612,4254 1551,4273 1629,4273 1590,4286 1533,4291 1647,4291 1572,4304 1608,4304 1411,4307 1436,4307 1461,4307 1486,4307 1511,4307 1669,4307 1694,4307 1719,4307 1744,4307 1769,4307 1554,4322 1626,4322 1411,4343 1436,4343 1461,4343 1486,4343 1511,4343 1536,4343 1644,4343 1669,4343 1694,4343 1719,4343 1744,4343 1769,4343 4416,5081 4452,5081 7712,5081 7748,5081 4416,5106 4452,5106 7712,5106 7748,5106 4416,5131 4452,5131 7712,5131 7748,5131 4416,5156 4452,5156 7712,5156 7748,5156 4416,5181 4452,5181 7712,5181 7748,5181 4416,5206 4452,5206 7712,5206 7748,5206 4468,5228 7696,5228 4416,5231 7748,5231 4486,5246 7678,5246 4437,5249 7727,5249 4509,5263 4534,5263 4559,5263 4584,5263 4609,5263 4634,5263 4659,5263 4684,5263 4709,5263 4734,5263 4759,5263 4784,5263 4809,5263 4834,5263 4859,5263 4884,5263 4909,5263 4934,5263 4959,5263 4984,5263 5009,5263 5034,5263 5059,5263 5084,5263 5109,5263 5134,5263 5159,5263 5184,5263 5209,5263 5234,5263 5259,5263 5284,5263 5309,5263 5334,5263 5359,5263 5384,5263 5409,5263 5434,5263 5459,5263 5484,5263 5509,5263 5534,5263 5559,5263 5584,5263 5609,5263 5634,5263 5659,5263 5684,5263 5709,5263 5734,5263 5759,5263 5784,5263 5809,5263 5834,5263 5859,5263 5884,5263 5909,5263 5934,5263 5959,5263 5984,5263 6009,5263 6034,5263 6059,5263 6084,5263 6109,5263 6134,5263 6159,5263 6184,5263 6209,5263 6234,5263 6259,5263 6284,5263 6309,5263 6334,5263 6359,5263 6384,5263 6409,5263 6434,5263 6459,5263 6484,5263 6509,5263 6534,5263 6559,5263 6584,5263 6609,5263 6634,5263 6659,5263 6684,5263 6709,5263 6734,5263 6759,5263 6784,5263 6809,5263 6834,5263 6859,5263 6884,5263 6909,5263 6934,5263 6959,5263 6984,5263 7009,5263 7034,5263 7059,5263 7084,5263 7109,5263 7134,5263 7159,5263 7184,5263 7209,5263 7234,5263 7259,5263 7284,5263 7309,5263 7334,5263 7359,5263 7384,5263 7409,5263 7434,5263 7459,5263 7484,5263 7509,5263 7534,5263 7559,5263 7584,5263 7609,5263 7634,5263 7660,5263 4455,5267 7709,5267 4473,5285 7691,5285 4455,5303 7709,5303 4509,5307 4534,5307 4559,5307 4584,5307 4609,5307 4634,5307 4659,5307 4684,5307 4709,5307 4734,5307 4759,5307 4784,5307 4809,5307 4834,5307 4859,5307 4884,5307 4909,5307 4934,5307 4959,5307 4984,5307 5009,5307 5034,5307 5059,5307 5084,5307 5109,5307 5134,5307 5159,5307 5184,5307 5209,5307 5234,5307 5259,5307 5284,5307 5309,5307 5334,5307 5359,5307 5384,5307 5409,5307 5434,5307 5459,5307 5484,5307 5509,5307 5534,5307 5559,5307 5584,5307 5609,5307 5634,5307 5659,5307 5684,5307 5709,5307 5734,5307 5759,5307 5784,5307 5809,5307 5834,5307 5859,5307 5884,5307 5909,5307 5934,5307 5959,5307 5984,5307 6009,5307 6034,5307 6059,5307 6084,5307 6109,5307 6134,5307 6159,5307 6184,5307 6209,5307 6234,5307 6259,5307 6284,5307 6309,5307 6334,5307 6359,5307 6384,5307 6409,5307 6434,5307 6459,5307 6484,5307 6509,5307 6534,5307 6559,5307 6584,5307 6609,5307 6634,5307 6659,5307 6684,5307 6709,5307 6734,5307 6759,5307 6784,5307 6809,5307 6834,5307 6859,5307 6884,5307 6909,5307 6934,5307 6959,5307 6984,5307 7009,5307 7034,5307 7059,5307 7084,5307 7109,5307 7134,5307 7159,5307 7184,5307 7209,5307 7234,5307 7259,5307 7284,5307 7309,5307 7334,5307 7359,5307 7384,5307 7409,5307 7434,5307 7459,5307 7484,5307 7509,5307 7534,5307 7559,5307 7584,5307 7609,5307 7634,5307 7660,5307 4437,5321 7727,5321 4486,5324 7678,5324 4416,5339 7748,5339 4468,5342 7696,5342 4416,5364 4452,5364 7712,5364 7748,5364 4416,5389 4452,5389 7712,5389 7748,5389 4416,5414 4452,5414 7712,5414 7748,5414 4416,5439 4452,5439 7712,5439 7748,5439 4416,5464 4452,5464 7712,5464 7748,5464 4416,5489 4452,5489 7712,5489 7748,5489
  other v3: 174,4915 214,4915 254,4915 294,4915 334,4915 374,4915 414,4915 454,4915 494,4915 534,4915 3470,4915 3510,4915 3550,4915 3590,4915 3630,4915 3670,4915 3710,4915 3750,4915 3790,4915 3830,4915 4255,4915 4295,4915 4335,4915 4375,4915 4415,4915 4455,4915 4495,4915 4535,4915 4575,4915 4615,4915 7550,4915 7590,4915 7630,4915 7670,4915 7710,4915 7750,4915 7790,4915 7830,4915 7870,4915 7910,4915 174,4955 214,4955 254,4955 294,4955 334,4955 374,4955 414,4955 454,4955 494,4955 534,4955 3470,4955 3510,4955 3550,4955 3590,4955 3630,4955 3670,4955 3710,4955 3750,4955 3790,4955 3830,4955 4255,4955 4295,4955 4335,4955 4375,4955 4415,4955 4455,4955 4495,4955 4535,4955 4575,4955 4615,4955 7550,4955 7590,4955 7630,4955 7670,4955 7710,4955 7750,4955 7790,4955 7830,4955 7870,4955 7910,4955 294,4995 414,4995 3590,4995 3710,4995 4375,4995 4495,4995 7670,4995 7790,4995 174,5075 214,5075 254,5075 454,5075 494,5075 534,5075 3470,5075 3510,5075 3550,5075 3750,5075 3790,5075 3830,5075 4255,5075 4295,5075 4335,5075 4535,5075 4575,5075 4615,5075 7550,5075 7590,5075 7630,5075 7830,5075 7910,5075 174,5115 214,5115 254,5115 454,5115 494,5115 534,5115 3470,5115 3510,5115 3550,5115 3750,5115 3790,5115 3830,5115 4255,5115 4295,5115 4335,5115 4535,5115 4575,5115 4615,5115 7550,5115 7590,5115 7630,5115 7830,5115 7910,5115 174,5455 214,5455 254,5455 454,5455 494,5455 534,5455 3470,5455 3510,5455 3550,5455 3750,5455 3790,5455 3830,5455 4254,5455 4294,5455 4334,5455 4534,5455 4574,5455 4614,5455 7550,5455 7590,5455 7630,5455 7830,5455 7910,5455 174,5495 214,5495 254,5495 454,5495 494,5495 534,5495 3470,5495 3510,5495 3550,5495 3750,5495 3790,5495 3830,5495 4254,5495 4294,5495 4334,5495 4534,5495 4574,5495 4614,5495 7550,5495 7590,5495 7630,5495 7830,5495 7910,5495 294,5575 414,5575 3590,5575 3710,5575 4374,5575 4494,5575 7670,5575 7790,5575 174,5615 214,5615 254,5615 294,5615 334,5615 374,5615 414,5615 454,5615 494,5615 534,5615 3470,5615 3510,5615 3550,5615 3590,5615 3630,5615 3670,5615 3710,5615 3750,5615 3790,5615 3830,5615 4254,5615 4294,5615 4334,5615 4374,5615 4414,5615 4454,5615 4494,5615 4534,5615 4574,5615 4614,5615 7550,5615 7590,5615 7630,5615 7670,5615 7710,5615 7750,5615 7790,5615 7830,5615 7870,5615 7910,5615 174,5655 214,5655 254,5655 294,5655 334,5655 374,5655 414,5655 454,5655 494,5655 534,5655 3470,5655 3510,5655 3550,5655 3590,5655 3630,5655 3670,5655 3710,5655 3750,5655 3790,5655 3830,5655 7550,5655 7590,5655 7630,5655 7670,5655 7710,5655 7750,5655 7790,5655 7830,5655 7870,5655 7910,5655
  other v4: 354,4980 3650,4980 4435,4980 7730,4980 326,4993 382,4993 3622,4993 3678,4993 4407,4993 4463,4993 7702,4993 7758,4993 319,5021 389,5021 3615,5021 3685,5021 4400,5021 4470,5021 7695,5021 7765,5021 306,5045 402,5045 3602,5045 3698,5045 4387,5045 4483,5045 7682,5045 7778,5045 284,5069 424,5069 3580,5069 3720,5069 4365,5069 4505,5069 7660,5069 7800,5069 284,5097 424,5097 3580,5097 3720,5097 4365,5097 4505,5097 7660,5097 7800,5097 284,5125 424,5125 3580,5125 3720,5125 4365,5125 4505,5125 7660,5125 7800,5125 284,5445 424,5445 3580,5445 3720,5445 4364,5445 4504,5445 7660,5445 7800,5445 284,5473 424,5473 3580,5473 3720,5473 4364,5473 4504,5473 7660,5473 7800,5473 284,5501 424,5501 3580,5501 3720,5501 4364,5501 4504,5501 7660,5501 7800,5501 306,5525 402,5525 3602,5525 3698,5525 4386,5525 4482,5525 7682,5525 7778,5525 319,5549 389,5549 3615,5549 3685,5549 4399,5549 4469,5549 7695,5549 7765,5549 326,5577 382,5577 3622,5577 3678,5577 4406,5577 4462,5577 7702,5577 7758,5577 354,5590 3650,5590 4434,5590 7730,5590
  other v5: 3672.49,2162.94 3672.49,2999.01 3672.49,3879.01
  other v6: 3248.5,580 3348.5,580 3448.5,580 3548.5,580 3648.5,580 3248.5,680 3348.5,680 3448.5,680 3548.5,680 3648.5,680 3248.5,780 3348.5,780 3448.5,780 3548.5,780 3648.5,780 3248.5,880 3348.5,880 3448.5,880 3548.5,880 3648.5,880 3248.5,980 3348.5,980 3448.5,980 3548.5,980 3648.5,980
IREF0: C9.2 C17.2 H10.1 R5.1 | length 1908.6
  Top Layer w20: R5.1@5723.03,2730 5723.03,2576.97 C17.2@5721.06,2575 5721.06,2545.15 5721.59,2544.62 5721.59,2461.91 v5(5723.5,2460) ; v5@6983.5,2700 H10.1@7193.5,2700
  Bottom Layer w20: v5(5723.5,2460) 5808.5,2460 5838.5,2490 5838.5,2605 5933.5,2700 v5@6983.5,2700
  other v5: 6988.5,2700
IREF0_M: H9.1 R5.2 | length 830.4
  Top Layer w20: H9.1@4973.5,2700 4973.5,2770 5013.5,2810 5618.5,2810 5663.97,2764.53 R5.2@5663.97,2730
IREF1: C10.2 C18.2 H10.2 R6.1 | length 1442.5
  Top Layer w20: v5@6078.5,2460 v5(6081.36,2462.86) R6.1@6081.36,2730 ; v5(6988.5,2600) H10.2@7193.5,2600
  Bottom Layer w20: v5(6081.36,2462.86) 6083.27,2460.95 6090.35,2460.95 6091.29,2460 6208.5,2460 6303.5,2555 6308.5,2555 6353.5,2600 v5(6988.5,2600)
IREF1_M: H9.2 R6.2 | length 1658.7
  Top Layer w20: H9.2@4973.5,2600 4833.5,2600 4808.5,2625 4808.5,2785 4873.5,2850 5958.5,2850 6018.5,2790 6018.5,2733.81 R6.2@6022.31,2730
IREF2: C11.2 C19.2 H10.3 R7.1 | length 1033.6
  Top Layer w20: v5(6438.5,2470) 6437.73,2470.77 C19.2@6437.73,2575 6439.69,2576.97 R7.1@6439.69,2730 ; v5@6983.5,2500 H10.3@7193.5,2500
  Bottom Layer w20: v5(6438.5,2470) 6558.5,2470 6588.5,2500 v5@6983.5,2500 ; v5@6986,2500 v5@6991,2500
  other v5: 6988.5,2500
IREF2_M: H9.3 R7.2 | length 2255.8
  Top Layer w20: H9.3@4973.5,2500 4818.5,2500 4763.5,2555 4763.5,2805 4848.5,2890 6313.5,2890 6380.64,2822.86 R7.2@6380.64,2730
IREF3: C12.2 C20.2 H10.4 R8.1 | length 709.5
  Top Layer w20: R8.1@6798.03,2730 6798.03,2650 6798.03,2576.97 C20.2@6796.06,2575 6796.06,2517.44 6913.5,2400 H10.4@7193.5,2400 H10.4@7243.5,2400
IREF3_M: H9.4 R8.2 | length 2826.5
  Top Layer w20: H9.4@4973.5,2400 4793.5,2400 4718.5,2475 4718.5,2820 4828.5,2930 6618.5,2930 6738.97,2809.53 R8.2@6738.97,2730
IREF4: C13.2 C21.2 H10.7 R9.1 | length 3309
  Top Layer w20: C21.2@5731.06,2070 5733.03,2071.97 5733.03,2145 R9.1@5733.03,2215 ; C21.2@5733.5,2065.06 5733.5,1900 5788.5,1845 7518.5,1845 7718.5,2045 7718.5,2525 7543.5,2700 H10.7@7363.5,2700
IREF4_M: H9.7 R9.2 | length 985.5
  Top Layer w20: H9.7@5088.5,2700 5453.5,2700 5538.5,2615 5538.5,2275 5598.5,2215 R9.2@5673.97,2215
IREF5: C14.2 C22.2 H10.8 R10.1 | length 2669.6
  Top Layer w20: R10.1@6091.36,2215 6091.36,2145 6091.36,2071.97 C22.2@6089.39,2070 6093.5,2065.89 6093.5,1945 6138.5,1900 7478.5,1900 7658.5,2080 7658.5,2470 7528.5,2600 H10.8@7363.5,2600
IREF5_M: H9.8 R10.2 | length 1200.5
  Top Layer w20: H9.8@5088.5,2600 5315.79,2600 5320.79,2605 v5(5323.5,2605) ; R10.2@6032.31,2215 6033.5,2216.19 6032.31,2217.39 6032.31,2384.81 v5(6032.5,2385)
  Bottom Layer w20: v5(5323.5,2605) 5328.5,2610 5448.5,2610 ; 5458.5,2605 5683.5,2380 6023.5,2380 v5@6028.5,2385
IREF6: C15.2 C23.2 H10.9 R11.1 | length 2014.7
  Top Layer w20: 6448.5,1995 6448.5,2069.23 C23.2@6447.73,2070 6449.69,2071.97 6449.69,2145 R11.1@6449.69,2215 ; 6451.69,1996.81 6498.5,1950 7423.5,1950 7588.5,2115 7588.5,2430 7518.5,2500 H10.9@7363.5,2500
IREF6_M: H9.9 R11.2 | length 1500.4
  Top Layer w20: H9.9@5088.5,2500 H9.9@5143.5,2500 v5(5323.5,2500) ; v5(6388.5,2340) 6390.41,2338.09 6390.41,2265.38 6390.64,2265.16 R11.2@6390.64,2215
  Bottom Layer w20: v5(5323.5,2500) 5325.41,2498.09 5455.41,2498.09 5623.5,2330 6361.78,2330 6366.04,2334.26 6382.76,2334.26 v5(6388.5,2340)
IREF7: C16.2 C24.2 H10.10 R12.1 | length 1331.2
  Top Layer w20: C24.2@6803.56,2067.5 6871.06,2000 ; C24.2@6806.06,2070 6808.03,2071.97 6808.03,2145 R12.1@6808.03,2215 ; 6873.5,2000 7368.5,2000 7523.5,2155 7523.5,2350 7473.5,2400 H10.10@7363.5,2400
IREF7_M: H9.10 R12.2 | length 1777.3
  Top Layer w20: H9.10@5088.5,2400 v5(5323.5,2400) ; v5(6747.67,2285) 6748.97,2283.7 R12.2@6748.97,2215
  Bottom Layer w20: v5(5323.5,2400) 5438.5,2400 5553.5,2285 v5(6747.67,2285)
IREF8: C29.2 C37.2 H17.1 R13.1 | length 2379.6
  Top Layer w20: v5(5168.5,1270) 5170.41,1271.91 5170.41,1344.35 C37.2@5171.06,1345 C29.2@5171.06,1425 5173.03,1426.97 R13.1@5173.03,1500 ; v5@6993.5,1530 v5(6998.5,1530) H17.1@7183.5,1530 H17.1@7203.5,1530
  Bottom Layer w20: v5(5168.5,1270) 5323.5,1270 5583.5,1530 v5(6998.5,1530)
IREF8_M: R13.2 VR5.2 | length 186.4
  Top Layer w20: VR5.2@5110.69,1685 5110.69,1503.28 R13.2@5113.97,1500
IREF9: C30.2 C38.2 H17.2 R14.1 | length 1788.1
  Top Layer w20: v5(5713.5,1270) 5715.41,1271.91 5715.41,1344.35 C38.2@5716.06,1345 C30.2@5716.06,1425 5718.03,1426.97 R14.1@5718.03,1500 ; v5(6998.5,1430) H17.2@7183.5,1430 H17.2@7203.5,1430
  Bottom Layer w20: v5(5713.5,1270) 5868.5,1270 6028.5,1430 v5(6998.5,1430)
IREF9_M: R14.2 VR6.2 | length 186.4
  Top Layer w20: VR6.2@5655.69,1685 5655.69,1503.28 R14.2@5658.97,1500
IREF10: C31.2 C39.2 H17.3 R15.1 | length 1209.2
  Top Layer w20: v5(6258.5,1270) 6260.41,1271.91 6260.41,1344.35 C39.2@6261.06,1345 C31.2@6261.06,1425 6263.03,1426.97 R15.1@6263.03,1500 ; v5@6993.5,1330 v5(6998.5,1330) H17.3@7183.5,1330 H17.3@7203.5,1330
  Bottom Layer w20: v5(6258.5,1270) 6383.5,1270 6443.5,1330 v5(6998.5,1330) v5@7001,1330
IREF10_M: R15.2 VR7.2 | length 186.4
  Top Layer w20: VR7.2@6200.69,1685 6200.69,1503.28 R15.2@6203.97,1500
IREF11: C32.2 C40.2 H17.4 R16.1 | length 602
  Top Layer w20: R16.1@6808.03,1500 6808.03,1426.97 C32.2@6806.06,1425 C40.2@6806.06,1345 6806.06,1343.03 6919.09,1230 H17.4@7183.5,1230 H17.4@7203.5,1230
IREF11_M: R16.2 VR8.2 | length 186.4
  Top Layer w20: VR8.2@6745.69,1685 6745.69,1503.28 R16.2@6748.97,1500
IREF12: C33.2 C41.2 H17.7 R17.1 | length 3987.2
  Top Layer w20: R17.1@5173.03,910 5173.03,836.97 C33.2@5171.06,835 C41.2@5171.06,755 5171.06,612.44 5228.5,555 7558.5,555 7704.01,700.51 7704.01,1379.49 7553.5,1530 H17.7@7373.5,1530
IREF12_M: R17.2 VR9.2 | length 191.4
  Top Layer w20: VR9.2@5110.69,1100 5110.69,913.28 R17.2@5113.97,910
IREF13: C34.2 C42.2 H17.8 R18.1 | length 3163.2
  Top Layer w20: R18.1@5718.03,910 5718.03,836.97 C34.2@5716.06,835 C42.2@5716.06,755 5716.06,652.44 5763.5,605 7513.5,605 7644.01,735.51 7644.01,1324.49 7538.5,1430 H17.8@7373.5,1430
IREF13_M: R18.2 VR10.2 | length 191.4
  Top Layer w20: VR10.2@5655.69,1100 5655.69,913.28 R18.2@5658.97,910
IREF14: C35.2 C43.2 H17.9 R19.1 | length 2338
  Top Layer w20: R19.1@6263.03,910 6263.03,836.97 C35.2@6261.06,835 C43.2@6261.06,755 6261.06,682.44 6293.5,650 7453.5,650 7574.01,770.51 7574.01,1284.49 7528.5,1330 H17.9@7373.5,1330
IREF14_M: R19.2 VR11.2 | length 186.4
  Top Layer w20: VR11.2@6200.69,1095 6200.69,913.28 R19.2@6203.97,910
IREF15: C36.2 C44.2 H17.10 R20.1 | length 1476.8
  Top Layer w20: R20.1@6808.03,910 6808.03,836.97 C36.2@6806.06,835 C44.2@6806.06,755 6806.06,753.03 6811.81,747.28 6813.78,747.28 6871.06,690 7388.5,690 7509.01,810.51 7509.01,1204.49 7483.5,1230 H17.10@7373.5,1230
IREF15_M: R20.2 VR12.2 | length 186.4
  Top Layer w20: VR12.2@6745.69,1095 6745.69,913.28 R20.2@6748.97,910
NC0: VR1.3
NC1: VR2.3
NC2: VR3.3
NC3: VR4.3
NetC5_1: C5.1 R1.1 U1.5 VR1.1 | length 709.9
  Top Layer w40: U1.5@3219.72,4528.86 3342.36,4528.86 3398.5,4585 VR1.1@3473.47,4585 3478.5,4580 3543.5,4580 3578.5,4545 3578.5,4465 3523.5,4410 3523.5,4259.94 C5.1@3525.94,4257.5
NetC6_1: C6.1 R2.1 U2.5 VR2.1 | length 709.9
  Top Layer w40: U2.5@3219.72,3698.86 3342.36,3698.86 3398.5,3755 VR2.1@3473.47,3755 3478.5,3750 3543.5,3750 3578.5,3715 3578.5,3635 3523.5,3580 3523.5,3429.94 C6.1@3525.94,3427.5
NetC7_1: C7.1 R3.1 U3.5 VR3.1 | length 709.9
  Top Layer w40: U3.5@3219.69,2812.78 3342.33,2812.78 3398.47,2868.92 3473.47,2868.92 3478.47,2863.92 3543.47,2863.92 3578.47,2828.92 3578.47,2748.92 3523.47,2693.92 3523.47,2543.86 C7.1@3525.91,2541.42
NetC8_1: C8.1 R4.1 U4.5 VR4.1 | length 709.9
  Top Layer w40: U4.5@3219.69,1982.78 3342.33,1982.78 3398.47,2038.92 VR4.1@3473.47,2038.92 3478.47,2033.92 3543.47,2033.92 3578.47,1998.92 3578.47,1918.92 3523.47,1863.92 3523.47,1713.86 C8.1@3525.91,1711.42
VDD0: C5.2 H5.2 H5.4 H5.6 H5.8 R1.2 U1.4
VDD1: C6.2 H6.2 H6.4 H6.6 H6.8 R2.2 U2.4
VDD2: C7.2 H7.2 H7.4 H7.6 H7.8 R3.2 U3.4
VDD3: C8.2 H8.2 H8.4 H8.6 H8.8 R4.2 U4.4 VR5.1 VR6.1 VR7.1 VR8.1 VR9.1 VR10.1 VR11.1 VR12.1
VDD12_0: C26.2 H13.1 H15.4 H15.5 H15.6 U5.4 | length 1963.3
  Top Layer w14: U5.4@6219.75,4372.2 6867.2,4372.2 H15.4@6920,4425 ; H15.4@6914.53,4425 H15.4@6920,4425 ; H15.4@6924.88,4429.88 H15.4@6920,4425 ; H15.4@6945,4425 H15.4@6920,4425
  Top Layer w40: H13.1@6260,4665 6400,4665 6495,4760 6925,4760 6960,4725 H15.6@6960,4625 ; H15.4@6960,4425 H15.5@6960,4525 H15.6@6960,4625 ; 7110,4625 H15.6@6960,4625
VDD12_1: C28.2 H14.1 H16.4 H16.5 H16.6 U6.4 | length 1962.5
  Top Layer w14: U6.4@6234.75,3362.2 6882.2,3362.2 H16.4@6935,3415 ; H16.4@6929.53,3415 H16.4@6935,3415 ; H16.4@6939.88,3419.88 H16.4@6935,3415 ; H16.4@6960,3415 H16.4@6935,3415
  Top Layer w40: H14.1@6270,3655 6410,3655 6505,3750 6930,3750 6975,3705 H16.6@6975,3615 ; H16.4@6975,3415 H16.5@6975,3515 H16.6@6975,3615 ; 7125,3615 H16.6@6975,3615
VDD33: C1.2 C2.2 C3.2 C4.2 H1.3 H2.3 H3.3 H4.3 P1.1 U1.2 U2.2 U3.2 U4.2 | length 5092.5
  Top Layer w40: C4.2@2446.03,1533.92 2584.72,1533.92 v7(2591.59,1540.8) 2592.24,1541.44 2704.66,1541.44 v7(2705.3,1542.09) ; C3.2@2456.03,2363.92 2588.62,2363.92 v7(2593.55,2368.85) ; C2.2@2456.06,3250 2588.65,3250 v7(2593.58,3254.92) ; C1.2@2456.06,4080 2588.65,4080 v7(2593.58,4084.92) ; H4.3@2468.47,1783.92 2468.47,1683.45 v7@2583.94,1567.98 ; H3.3@2468.47,2613.92 2470.42,2611.97 2470.42,2511.5 2585.89,2396.03 2585.89,2376.5 v7(2593.55,2368.85) ; H2.3@2468.5,3500 2470.45,3498.05 2470.45,3397.57 2585.92,3282.1 2585.92,3262.58 v7(2593.58,3254.92) ; H1.3@2468.5,4330 2470.45,4328.05 2470.45,4227.57 2585.92,4112.1 2585.92,4092.58 v7(2593.58,4084.92) ; P1.1@2593.5,983.5 P1.1@2595,985 ; P1.1@2680,866.5 P1.1@2680,985 ; v7@2707.26,1537.63 2711.65,1542.03 2831.58,1542.03 2833.47,1543.92 3018.47,1543.92 3088.47,1613.92 3088.47,1758.56 3111.9,1781.99 U4.2@3219.69,1781.99 ; U3.2@3219.69,2611.99 3111.9,2611.99 3088.47,2588.56 3088.47,2443.92 3018.47,2373.92 v7(2833.47,2373.92) 2831.58,2372.03 2711.65,2372.03 2707.26,2367.63 2594.76,2367.63 v7(2593.55,2368.85) ; U2.2@3219.72,3498.07 3111.93,3498.07 3088.5,3474.64 3088.5,3330 3018.5,3260 v7(2833.5,3260) 2831.61,3258.11 2711.68,3258.11 2707.29,3253.71 2594.79,3253.71 v7(2593.58,3254.92) ; U1.2@3219.72,4328.07 3111.93,4328.07 3088.5,4304.64 3088.5,4160 3018.5,4090 v7(2833.5,4090) 2831.61,4088.11 2711.68,4088.11 2707.29,4083.71 2594.79,4083.71 v7(2593.58,4084.92)
  other v1: 2450,1100 2550,1100 2650,1100 2750,1100 2500,1200 2600,1200 2700,1200 2800,1200 2450,1300 2550,1300 2650,1300 2750,1300 2500,1400 2600,1400 2700,1400 2800,1400 2550,1500 2650,1500 2750,1500 2500,1600 2600,1600 2700,1600 2800,1600 2900,1600 2550,1700 2550,1900 2450,2100 2550,2100 2500,2200 2450,2300 2550,2300 2650,2300 2750,2300 2850,2300 2950,2300 2500,2400 2900,2400 2450,2500 2550,2500 2550,2700 2450,2900 2550,2900 2500,3000 2450,3100 2550,3100 2500,3200 2600,3200 2700,3200 2800,3200 2900,3200 2450,3300 2550,3300 2650,3300 2750,3300 2500,3400 2550,3500 2550,3700 2500,3800 2450,3900 2550,3900 2650,4100 2500,4200 2550,4300
  other v6: 2393.5,580 2493.5,580 2593.5,580 2693.5,580 2793.5,580 2393.5,680 2493.5,680 2593.5,680 2693.5,680 2793.5,680 2393.5,780 2493.5,780 2593.5,780 2693.5,780 2793.5,780 2393.5,880 2493.5,880 2593.5,880 2693.5,880 2793.5,880 2393.5,980 2493.5,980 2593.5,980 2693.5,980 2793.5,980
  other v7: 2831.52,1545.88 2957.73,1549.66 2707.26,2370.13 2959.68,2377.71 2707.29,3256.21 2959.71,3263.79 2707.29,4086.21 2959.71,4093.79
VDD33_FPGA_0: C25.2 H11.6 H11.12 U5.13 | length 1040.7
  Top Layer w14: 5700,4415 5742.8,4372.2 U5.13@5980.25,4372.2
  Top Layer w20: 5700,4415 5700,4560
  Top Layer w30: 5615,4645 5700,4560
  Top Layer w40: C25.2@5137.44,4645 H11.12@5340,4645 H11.6@5510,4645 5615,4645
VDD33_FPGA_1: C27.2 H12.6 H12.12 U6.13 | length 1040.7
  Top Layer w14: 5715,3405 5757.8,3362.2 U6.13@5995.25,3362.2
  Top Layer w20: 5715,3405 5715,3550
  Top Layer w30: 5630,3635 5715,3550
  Top Layer w40: C27.2@5152.44,3635 H12.12@5355,3635 H12.6@5525,3635 5630,3635
pads on no net: H9.6 H9.12 H10.6 H10.12 H11.9 H11.10 H12.9 H12.10 H17.6 H17.12 VR5.3 VR6.3 VR7.3 VR8.3 VR9.3 VR10.3 VR11.3 VR12.3

## Polygon pours and split planes (outlines as drawn)
GND on Top Layer "Top Layer-No Net 1" (solid, shelved, pour order 20): 1085,4785 1085,420 8100,420 8100,4785 5013.4,4785 8100,4785 8100,5765 4075,5765 4075,4785
VDD3 on Top Layer "Top Layer-VDD3" (solid, remove dead copper, pour order 9): 3808.5,881 7053.5,881 7053.5,1197.5 4448.5,1197.5 4448.5,1465 7053.5,1465 7053.5,1782.75 4448.5,1782.75 4448.5,1605 4143.47,1605 4143.47,2093.92 3118.47,2093.92 3118.47,1883.92 3328.47,1883.92 3328.47,1603.92 3808.5,1603.92
VDD33 on Top Layer "Top Layer-No Net" (solid, remove dead copper, pour order 16): 2428,985 2843.5,985 2843.5,1461.42 3029.97,1461.42 3029.97,1626.42 2605,1626.42 2605,2288.92 3029.97,2288.92 3029.97,2453.92 2605,2453.92 2605,3175 3030,3175 3030,3340 2605,3340 2605,4005 3030,4005 3030,4170 2605,4170 2605,4420 2428,4420
VDD2 on Top Layer "VDD2_L01_P002" (solid, pour order 2): 3118.47,2713.92 3328.47,2713.92 3328.47,2433.92 4143.47,2433.92 4143.47,2923.92 3118.47,2923.92
VDD1 on Top Layer "VDD1_L01_P001" (solid, pour order 1): 3118.5,3600 3328.5,3600 3328.5,3320 4143.5,3320 4143.5,3810 3118.5,3810
VDD0 on Top Layer "VDD0_L01_P000" (solid, pour order 0): 3118.5,4430 3328.5,4430 3328.5,4150 4143.5,4150 4143.5,4640 3118.5,4640
GND on Bottom Layer "NONET_L04_P019" (solid, shelved, pour order 19): 8100,5765 8100,420 0,420 0,5765
VDD33 on Power Layer (split plane): 8079.9,440.1 20.1,440.1 20.1,5744.9 8079.9,5744.9
GND on GND Layer (split plane): 8079.9,440.1 20.1,440.1 20.1,5744.9 8079.9,5744.9

## Keep-outs
Top Layer:
  region: 4600,4710 ccw(c4710,4710) 4710,4600 ccw(c4710,4710) 4820,4710 ccw(c4710,4710) 4710,4820 ccw(c4710,4710)
  region: 7725,4710 ccw(c7835,4710) 7835,4600 ccw(c7835,4710) 7945,4710 ccw(c7835,4710) 7835,4820 ccw(c7835,4710)
  region: 7725,600 ccw(c7835,600) 7835,490 ccw(c7835,600) 7945,600 ccw(c7835,600) 7835,710 ccw(c7835,600)
  region: 4600,590 ccw(c4710,590) 4710,480 ccw(c4710,590) 4820,590 ccw(c4710,590) 4710,700 ccw(c4710,590)
  region: 145,590 ccw(c255,590) 255,480 ccw(c255,590) 365,590 ccw(c255,590) 255,700 ccw(c255,590)
  region: 145,4710 ccw(c255,4710) 255,4600 ccw(c255,4710) 365,4710 ccw(c255,4710) 255,4820 ccw(c255,4710)

## Other copper
Top Layer:
  rectangle net GND: 3174,492 3737,1057
  rectangle net VDD33: 2343.5,1003.73 2843.5,1071.25